# EAGLE board CT_schematic (EAGLE 7.6.0)

Size 100 x 80 mm. Coordinates in mm from the lower left corner, seen from the top.
Outline: 0,0 100,0 100,80 0,80 0,0
Copper layers (1*16): Top 0.035mm / dielectric 1.5mm / Bottom 0.035mm
Design rules "default": minimum track width 10mil, minimum drill 24mil, track to track 8mil, track to pad 8mil, pad to pad 8mil, via to via 8mil, smd to smd 8mil, copper to edge 40mil, drill to drill 8mil, minimum pad ring 10mil, minimum via ring 8mil, stop-mask expansion 4mil, vias tented up to drill 0mil, thermal gap 10mil

## Footprints (pad centres in the part's own frame; a part is rotated, then mirrored left to right if it is on the bottom)
C0603 = smd 0.8 x 0.8: 1 -0.762,0; 2 0.762,0
C0402 = smd 0.5 x 0.5: 1 -0.508,0; 2 0.508,0
C0805 = smd 1.2 x 1.3: 1 -1.016,0; 2 1.016,0
C1206 = smd 1.3 x 1.6: 1 -1.524,0; 2 1.524,0
DR1040 = smd 1.6 x 3.2: 1 -4.458,0; 2 4.458,0
R0603 = smd 0.8 x 0.8: 1 -0.762,0; 2 0.762,0
LQFP48 = smd 0.3 x 1.2: 1 -2.75,-4.25; 2 -2.25,-4.25; 3 -1.75,-4.25; 4 -1.25,-4.25; 5 -0.75,-4.25; 6 -0.25,-4.25; 7 0.25,-4.25; 8 0.75,-4.25; 9 1.25,-4.25; 10 1.75,-4.25; 11 2.25,-4.25; 12 2.75,-4.25; 25 2.75,4.25; 26 2.25,4.25; 27 1.75,4.25; 28 1.25,4.25; 29 0.75,4.25; 30 0.25,4.25; 31 -0.25,4.25; 32 -0.75,4.25; 33 -1.25,4.25; 34 -1.75,4.25; 35 -2.25,4.25; 36 -2.75,4.25 | smd 1.2 x 0.3: 13 4.25,-2.75; 14 4.25,-2.25; 15 4.25,-1.75; 16 4.25,-1.25; 17 4.25,-0.75; 18 4.25,-0.25; 19 4.25,0.25; 20 4.25,0.75; 21 4.25,1.25; 22 4.25,1.75; 23 4.25,2.25; 24 4.25,2.75; 37 -4.25,2.75; 38 -4.25,2.25; 39 -4.25,1.75; 40 -4.25,1.25; 41 -4.25,0.75; 42 -4.25,0.25; 43 -4.25,-0.25; 44 -4.25,-0.75; 45 -4.25,-1.25; 46 -4.25,-1.75; 47 -4.25,-2.25; 48 -4.25,-2.75
TST-110-05-T-D-RA = drill 1 pad 1.7 square: 1 0,0 | drill 1 pad 1.7: 2 0,2.54; 3 2.54,0; 4 2.54,2.54; 5 5.08,0; 6 5.08,2.54; 7 7.62,0; 8 7.62,2.54; 9 10.16,0; 10 10.16,2.54; 11 12.7,0; 12 12.7,2.54; 13 15.24,0; 14 15.24,2.54; 15 17.78,0; 16 17.78,2.54; 17 20.32,0; 18 20.32,2.54; 19 22.86,0; 20 22.86,2.54
WSON-8-PAD = smd 0.45 x 0.7: 1 -0.75,-0.95; 2 0.52,-0.95; 3 1.79,-0.95; 4 3.06,-0.95; 5 3.06,4.35; 6 1.79,4.35; 7 0.52,4.35; 8 -0.75,4.35 | smd 4 x 3.5: PAD 1.15,1.7
SOIC-8 = smd 1.6 x 0.6: 1 -2.7,1.905 | smd 1.55 x 0.6: 2 -2.7,0.635; 3 -2.7,-0.635; 4 -2.7,-1.905; 5 2.7,-1.905; 6 2.7,-0.635; 7 2.7,0.635; 8 2.7,1.905
182-009-MALE = drill 1.194 pad 1.524 octagon: 1 -5.537,10.923; 2 -2.769,10.923; 3 0,10.923; 4 2.769,10.923; 5 5.537,10.923; 6 -4.153,8.08; 7 -1.384,8.08; 8 1.384,8.08; 9 4.153,8.08 | hole 3.048: -12.446,9.501; 12.446,9.501
FCI_10118193-0001LF = smd 0.4 x 1.35: 1 -1.3,2.675; 2 -0.65,2.675; 3 0,2.675; 4 0.65,2.675; 5 1.3,2.675 | smd 1.6 x 1.4: 6 -3.2,2.45; 7 3.2,2.45 | smd 1.9 x 1.9: 8 -1.2,0; 9 1.2,0 | hole 0.5: -3.3,0; 3.3,0
SOT143B = smd 1 x 0.7: 1 -0.75,-1 | smd 0.6 x 0.7: 2 0.95,-1; 3 0.95,1; 4 -0.95,1
ABS07-32.768KHZ-7-T = smd 1.1 x 2.4: 1 -2.5,0; 2 0,0
ABLS-25.000MHZ-B2F-T = smd 5.6 x 2.8: 1 -3.81,0; 2 5.69,0
TSOT-23-5 = smd 1.3 x 0.62: 1 -1.31,0.95; 2 -1.31,0; 3 -1.31,-0.95; 4 1.31,-0.95; 5 1.31,0.95
DFN8_2X3MC = smd 0.813 x 0.305: 1 -1.398,0.75; 2 -1.398,0.25; 3 -1.398,-0.25; 4 -1.398,-0.75; 5 1.398,-0.75; 6 1.398,-0.25; 7 1.398,0.25; 8 1.398,0.75 | smd 1.753 x 1.549: 9 0,0
JST-2-SMD = smd 1 x 4.6: 1 -1,-3.7; 2 1,-3.7 | smd 1.6 x 3.4: NC1 -3.4,1.5; NC2 3.4,1.5
SON-6 = smd 0.55 x 0.3: 1 -0.355,0.5 | smd 0.52 x 0.3: 2 -0.37,0; 3 -0.37,-0.5; 4 0.37,-0.5; 5 0.37,0; 6 0.37,0.5
SW_4-1437565-2 = smd 1.4 x 2.1: 1 -2.23,4.55; 2 -2.23,-4.55; 3 2.23,4.55; 4 2.23,-4.55
LGM67K-G1J2-24-Z = smd 0.8 x 1.4: A -2,0; C 0,0
NC7SZ125M5X = smd 1.3 x 0.7: 1 -1.3,0.95; 2 -1.3,0; 3 -1.3,-0.95; 4 1.3,-0.95; 5 1.3,0.95

## Placement (x,y rotation side)
C1  1e-06  [C0603]  -68.58,60.96 0 top  (outside the outline)
C2  1e-07  [C0603]  -72.39,60.96 0 top  (outside the outline)
C3  1e-07  [C0603]  -15.24,66.04 0 top  (outside the outline)
C4  1e-07  [C0603]  -19.05,66.04 0 top  (outside the outline)
C5  1e-07  [C0603]  -22.86,66.04 0 top  (outside the outline)
C6  1e-07  [C0603]  -26.67,66.04 0 top  (outside the outline)
C7  4.7e-06  [C0603]  -64.77,60.96 0 top  (outside the outline)
C8  1e-08  [C0603]  -30.48,66.04 0 top  (outside the outline)
C9  1e-06  [C0603]  -34.29,66.04 0 top  (outside the outline)
C10  1e-07  [C0603]  -38.1,66.04 0 top  (outside the outline)
C11  1e-11  [C0402]  -72.39,66.04 0 top  (outside the outline)
C12  1e-11  [C0402]  -15.24,71.12 0 top  (outside the outline)
C13  1e-11  [C0402]  -19.05,71.12 0 top  (outside the outline)
C14  1e-11  [C0402]  -22.86,71.12 0 top  (outside the outline)
C15  1e-07  [C0402]  -26.67,71.12 0 top  (outside the outline)
C16  1e-06  [C0603]  -41.91,66.04 0 top  (outside the outline)
C17  1e-07  [C0402]  -30.48,71.12 0 top  (outside the outline)
C18  1e-05  [C0805]  -40.64,54.61 0 top  (outside the outline)
C19  1e-05  [C0805]  -45.72,54.61 0 top  (outside the outline)
C20  1e-07  [C0402]  -34.29,71.12 0 top  (outside the outline)
C21  1e-05  [C1206]  -69.85,46.99 0 top  (outside the outline)
C22  1e-05  [C1206]  -16.51,54.61 0 top  (outside the outline)
C23  1e-08  [C0402]  -38.1,71.12 0 top  (outside the outline)
C24  1e-08  [C0402]  -41.91,71.12 0 top  (outside the outline)
C25  1e-08  [C0402]  -45.72,71.12 0 top  (outside the outline)
I1  5.2e-06  [DR1040]  -36.83,27.94 0 top  (outside the outline)
R1  10000.0  [R0603]  -25.4,60.96 0 top  (outside the outline)
R2  1000.0  [R0603]  -45.72,66.04 0 top  (outside the outline)
R3  1600.5  [R0603]  -49.53,66.04 0 top  (outside the outline)
R4  4700.0  [R0603]  -53.34,66.04 0 top  (outside the outline)
R5  4700.0  [R0603]  -57.15,66.04 0 top  (outside the outline)
R6  10000.0  [R0603]  -30.48,60.96 0 top  (outside the outline)
R7  10000.0  [R0603]  -35.56,60.96 0 top  (outside the outline)
R8  10000.0  [R0603]  -40.64,60.96 0 top  (outside the outline)
R9  10000.0  [R0603]  -45.72,60.96 0 top  (outside the outline)
R10  120.0  [R0603]  -60.96,66.04 0 top  (outside the outline)
R11  100000.0  [R0603]  -63.5,54.61 0 top  (outside the outline)
R12  220000.0  [R0603]  -68.58,54.61 0 top  (outside the outline)
R13  1000000.0  [R0603]  -58.42,54.61 0 top  (outside the outline)
R14  10000.0  [R0603]  -50.8,60.96 0 top  (outside the outline)
R15  10000.0  [R0603]  -55.88,60.96 0 top  (outside the outline)
R16  9100.0  [R0603]  -64.77,66.04 0 top  (outside the outline)
R17  680000.0  [R0603]  -15.24,60.96 0 top  (outside the outline)
R18  120000.0  [R0603]  -20.32,60.96 0 top  (outside the outline)
R19  2000.0  [R0603]  -68.58,66.04 0 top  (outside the outline)
R20  10000.0  [R0603]  -60.96,60.96 0 top  (outside the outline)
U1  STM32L433CCT6  [LQFP48]  -68.58,27.94 0 top  (outside the outline)
U2  TST-110-05-T-D-RA  [TST-110-05-T-D-RA]  -71.12,35.56 0 top  (outside the outline)
U3  MX25R6435FZAIH0  [WSON-8-PAD]  -27.94,26.67 0 top  (outside the outline)
U4  SN65HVD230D  [SOIC-8]  -21.59,39.37 0 top  (outside the outline)
U5  182-009-113R531  [182-009-MALE]  -36.83,6.35 0 top  (outside the outline)
U6  10118193-0001LF  [FCI_10118193-0001LF]  -31.75,38.1 0 top  (outside the outline)
U7  prtr5v0u2ax  [SOT143B]  -58.42,71.12 0 top  (outside the outline)
U8  ABS07-32.768KHZ-7-T  [ABS07-32.768KHZ-7-T]  -49.53,48.26 0 top  (outside the outline)
U9  ABLS-25.000MHZ-B2F-T  [ABLS-25.000MHZ-B2F-T]  -26.67,48.26 0 top  (outside the outline)
U10  ltc3406es5  [TSOT-23-5]  -50.8,54.61 0 top  (outside the outline)
U11  MCP73831T-2ACI/MC  [DFN8_2X3MC]  -68.58,69.85 0 top  (outside the outline)
U12  S2B-PH-SM4-TB(LF)(SN)  [JST-2-SMD]  -52.07,29.21 0 top  (outside the outline)
U13  TPS3895ADRYR  [SON-6]  -62.23,69.85 0 top  (outside the outline)
U14  4-1437565-2  [SW_4-1437565-2]  -67.31,6.35 0 top  (outside the outline)
U15  Q65110A2395  [LGM67K-G1J2-24-Z]  -58.42,46.99 0 top  (outside the outline)
U16  nc7sz125m5x  [NC7SZ125M5X]  -21.59,54.61 0 top  (outside the outline)
U17  nc7sz125m5x  [NC7SZ125M5X]  -27.94,54.61 0 top  (outside the outline)
U18  nc7sz125m5x  [NC7SZ125M5X]  -34.29,54.61 0 top  (outside the outline)

## Library data of the parts
C1-C25 I1 R1-R20 U1-U18 = circuit_tree

## Nets
CLK_CRYSTAL_U1_3: C11.1 U1.3 U8.1
CLK_CRYSTAL_U1_4: C12.1 U1.4 U8.2
CLK_CRYSTAL_U1_5: C13.1 U1.5 U9.1
CLK_CRYSTAL_U1_6: C14.1 U1.6 U9.2
GND: C1.2 C2.2 C3.2 C4.2 C5.2 C6.2 C7.2 C8.2 C9.2 C10.2 C11.2 C12.2 C13.2 C14.2 C15.2 C16.2 C17.2 C18.2 C19.1 C19.2 C20.2 C21.2 C22.2 C23.2 C24.2 C25.2 R2.2 R6.2 R11.2 R12.2 R16.2 R18.2 R19.2 U1.8 U1.23 U1.35 U1.47 U2.4 U2.6 U2.8 U2.10 U2.12 U2.14 U2.16 U2.18 U2.20 U3.4 U3.PAD U4.2 U5.5 U6.5 U6.6 U6.7 U6.8 U6.9 U7.1 U10.2 U11.6 U11.9 U12.2 U13.2 U15.C U16.2 U16.3 U17.1 U17.3 U18.1 U18.3
INPUT_USBPOWER_5V: C21.1 R20.2 U6.1 U7.4 U11.1 U11.2
NET_U1_7: R5.1 U1.7 U18.4
NET_U1_43: R3.1 U1.43 U15.A
NET_U1_44: R1.1 R6.1 U1.44 U14.3 U14.4
NET_U3_7: R4.1 U1.16 U3.7 U17.4
NET_U4_6: R10.2 U4.6
NET_U4_8: R11.1 U4.8
NET_U5_2: R10.2 U4.6 U5.2
NET_U5_3: R10.1 U4.7 U5.3
NET_U10_1: U10.1
NET_U10_3: I1.1 U10.3
NET_U10_5: R12.1 R13.1 U10.5
NET_U10_ATNET_3: I1.2 R13.2
NET_U11_5: R20.1 U11.5
NET_U11_8: R19.1 U11.8
NET_U13_1: R15.1 R16.1 U13.1
NET_U13_3: R17.2 R18.1 U13.3
NET_U13_4: R14.1 U13.4 U16.4 U17.2 U18.2
NET_U14_1: R2.1 U14.1 U14.2
PROC_CAN1_RX: U1.45 U4.4
PROC_CAN1_TX: U1.46 U4.1
PROC_QUADSPI_BK1_IO0: U1.19 U3.5
PROC_QUADSPI_BK1_IO1: U1.18 U3.2
PROC_QUADSPI_BK1_IO2: R9.1 U1.17 U3.3
PROC_QUADSPI_BK1_NCS: R8.1 U1.12 U3.1
PROC_QUADSPI_CLK: U1.13 U3.6
PROC_SYS_JTCK_SWCLK: U1.37 U2.9
PROC_SYS_JTDO_SWO: U1.39 U2.13
PROC_SYS_JTMS_SWDIO: U1.34 U2.7
PROC_USB_DM: U1.32 U6.2 U7.3
PROC_USB_DP: U1.33 U6.3 U7.2
RST_OUT_U2_SRESET_B: R7.1 U2.15 U16.1
VCC_S1_3V7: C18.1 C22.1 U10.4 U11.3 U11.4 U12.1
VCC_TIER1_3V3: C1.1 C2.1 C3.1 C4.1 C5.1 C6.1 C7.1 C8.1 C9.1 C10.1 C15.1 C16.1 C17.1 C19.2 C20.1 C23.1 C24.1 C25.1 I1.2 R1.2 R3.2 R4.2 R5.2 R7.2 R8.2 R9.2 R13.2 R14.2 R15.2 R17.1 U1.1 U1.9 U1.24 U1.36 U1.48 U2.1 U3.8 U4.3 U13.6 U16.5 U17.5 U18.5

## Tracks (layer width: path | path; a pad name or v marks a point on that pad's centre or on a via)
CLK_CRYSTAL_U1_3  (2 unrouted)
CLK_CRYSTAL_U1_4  (2 unrouted)
CLK_CRYSTAL_U1_5  (2 unrouted)
CLK_CRYSTAL_U1_6  (2 unrouted)
GND  (67 unrouted)
INPUT_USBPOWER_5V  (5 unrouted)
NET_U1_7  (2 unrouted)
NET_U1_43  (2 unrouted)
NET_U1_44  (4 unrouted)
NET_U3_7  (3 unrouted)
NET_U4_6  (1 unrouted)
NET_U4_8  (1 unrouted)
NET_U5_2  (2 unrouted)
NET_U5_3  (2 unrouted)
NET_U10_3  (1 unrouted)
NET_U10_5  (2 unrouted)
NET_U10_ATNET_3  (1 unrouted)
NET_U11_5  (1 unrouted)
NET_U11_8  (1 unrouted)
NET_U13_1  (2 unrouted)
NET_U13_3  (2 unrouted)
NET_U13_4  (4 unrouted)
NET_U14_1  (2 unrouted)
PROC_CAN1_RX  (1 unrouted)
PROC_CAN1_TX  (1 unrouted)
PROC_QUADSPI_BK1_IO0  (1 unrouted)
PROC_QUADSPI_BK1_IO1  (1 unrouted)
PROC_QUADSPI_BK1_IO2  (2 unrouted)
PROC_QUADSPI_BK1_NCS  (2 unrouted)
PROC_QUADSPI_CLK  (1 unrouted)
PROC_SYS_JTCK_SWCLK  (1 unrouted)
PROC_SYS_JTDO_SWO  (1 unrouted)
PROC_SYS_JTMS_SWDIO  (1 unrouted)
PROC_USB_DM  (2 unrouted)
PROC_USB_DP  (2 unrouted)
RST_OUT_U2_SRESET_B  (2 unrouted)
VCC_S1_3V7  (5 unrouted)
VCC_TIER1_3V3  (41 unrouted)